# EAGLE board pic32 (EAGLE 5.12)
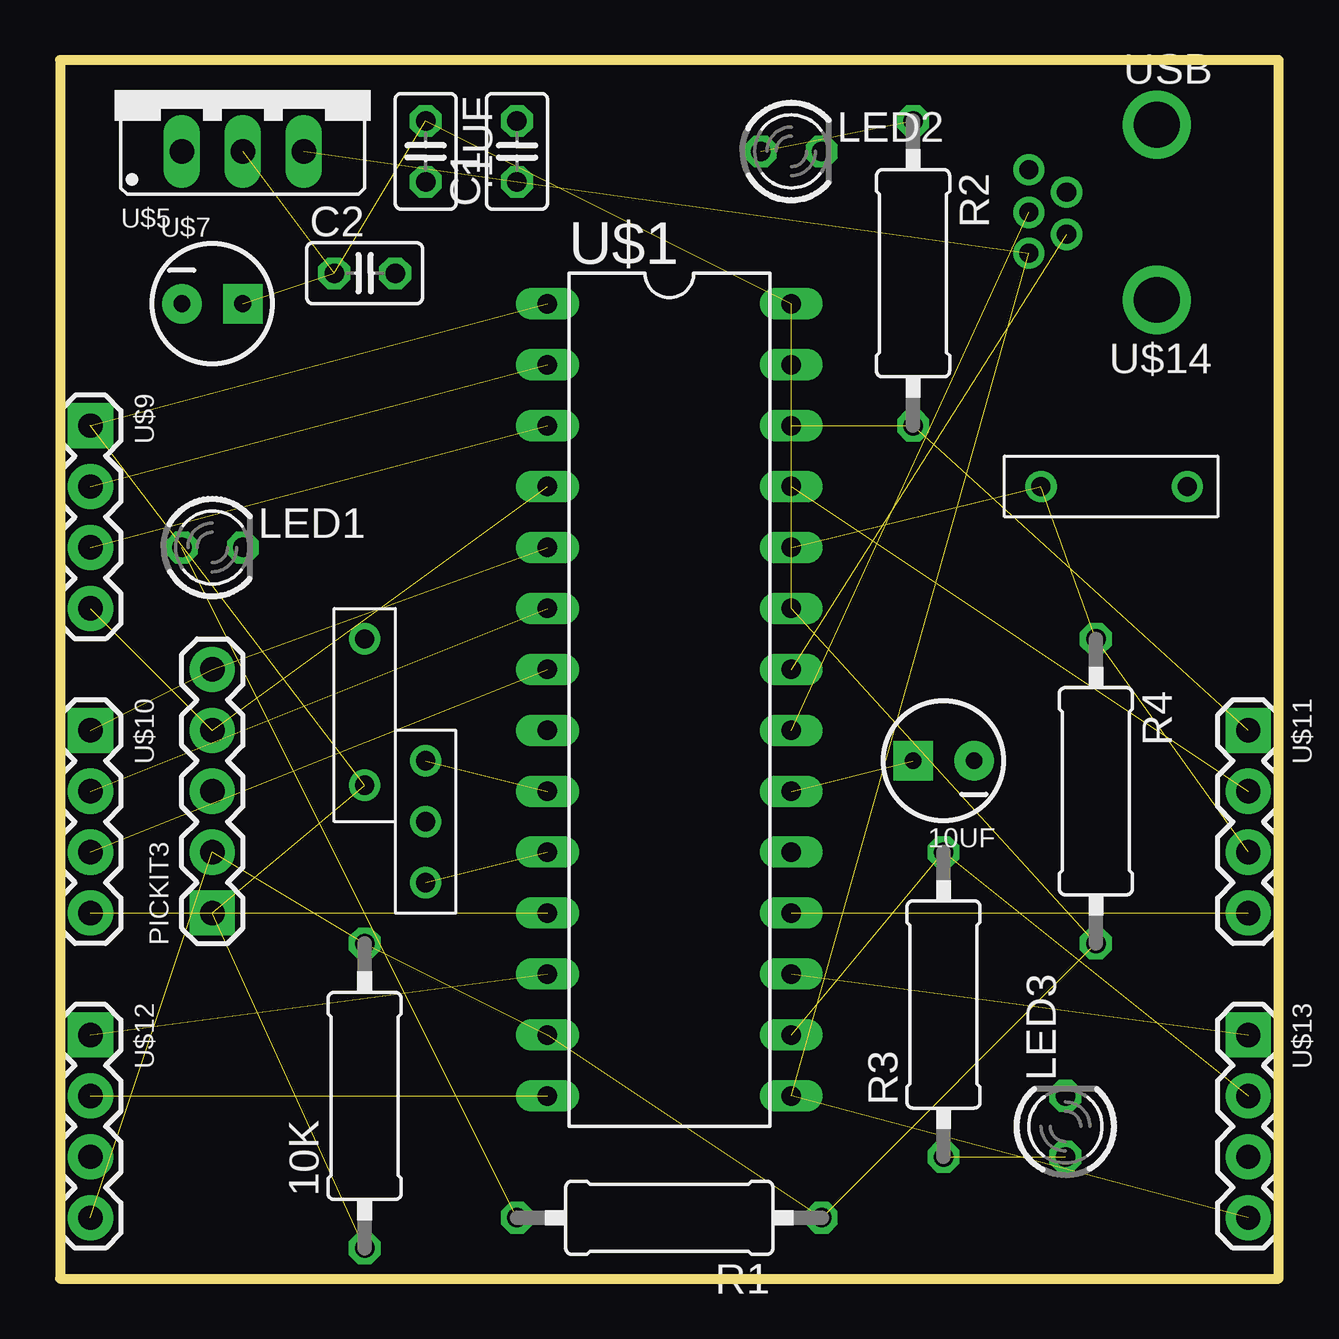
[diagram p0: board, top side]
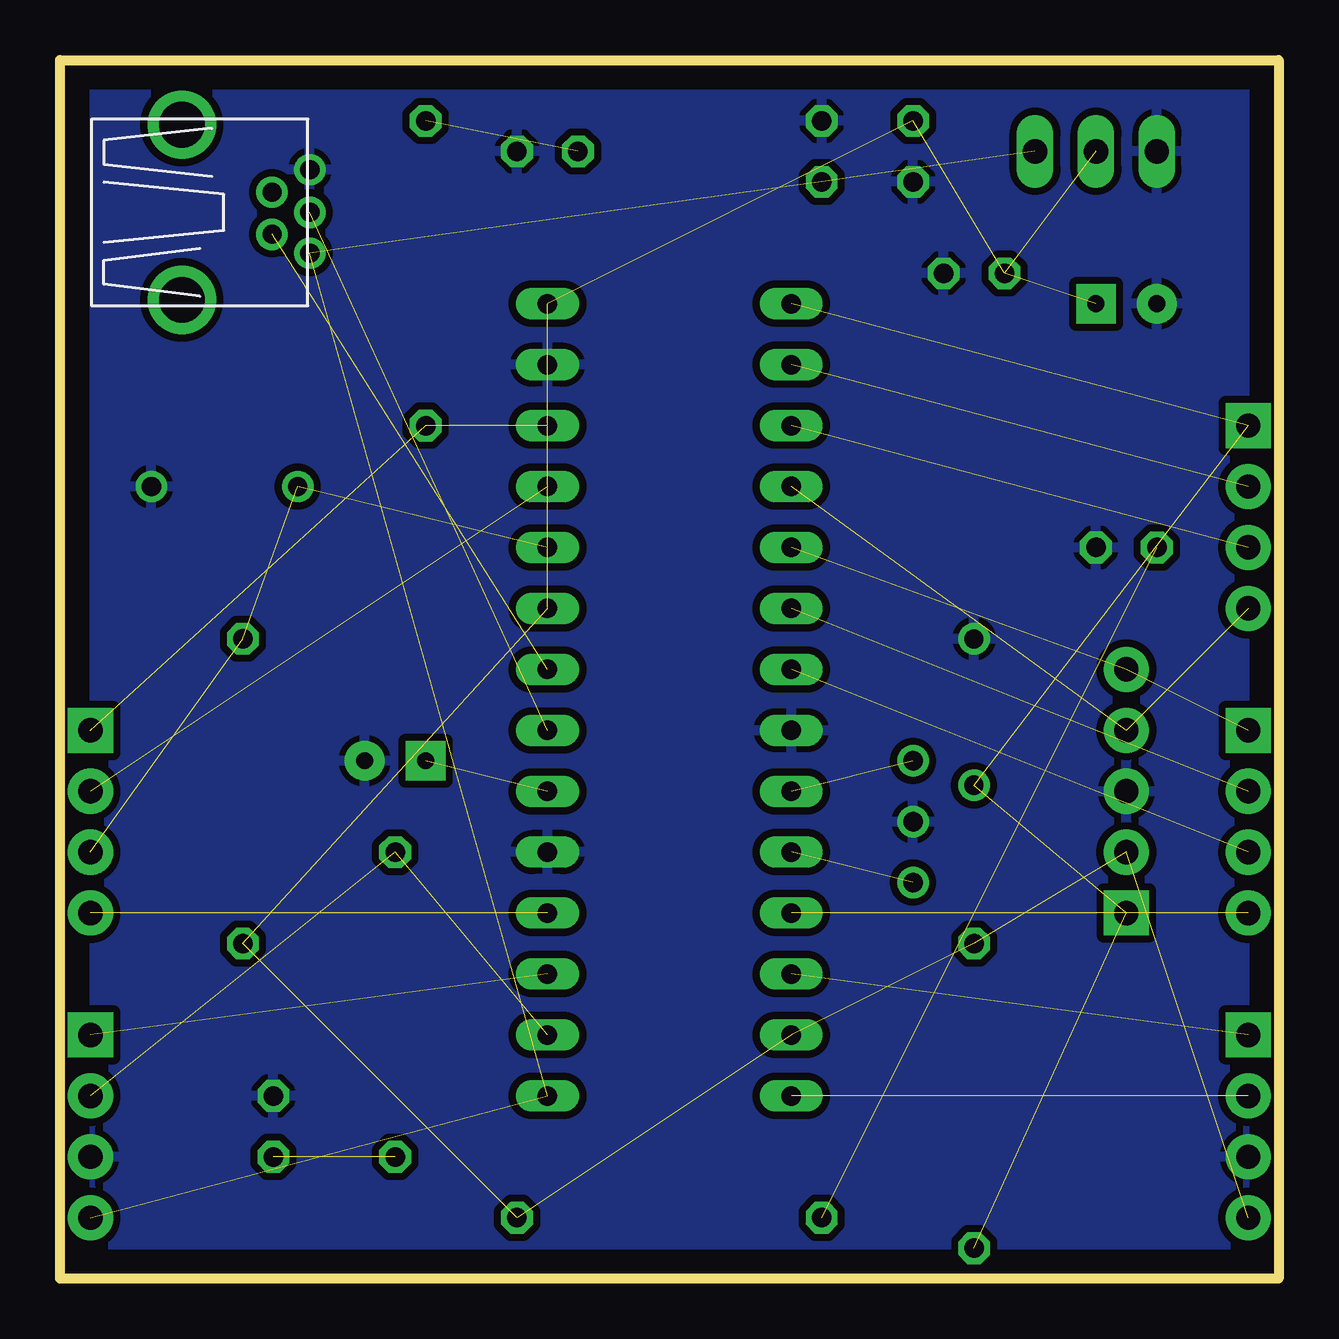
[diagram p1: board, bottom side, seen from below]

Size 50.8 x 50.8 mm. Coordinates in mm from the lower left corner, seen from the top.
Outline: 0,0 50.8,0 50.8,50.8 0,50.8 0,0
Copper layers (1*16): Top 0.035mm / dielectric 1.5mm / Bottom 0.035mm
Design rules "default": minimum track width 10mil, minimum drill 24mil, track to track 8mil, track to pad 8mil, pad to pad 8mil, via to via 8mil, smd to smd 8mil, copper to edge 40mil, drill to drill 8mil, minimum pad ring 10mil, minimum via ring 8mil, stop-mask expansion 4mil, vias tented up to drill 0mil, thermal gap 10mil

## Footprints (pad centres in the part's own frame; a part is rotated, then mirrored left to right if it is on the bottom)
0309/12 = drill 0.813 octagon: 1 -6.35,0; 2 6.35,0
CAP_POL_D = drill 0.7 pad 1.651 square: 1 1.27,0 | drill 0.7 pad 1.651 round: 2 -1.27,0
C025-025X050 = drill 0.813 octagon: 1 -1.27,0; 2 1.27,0
LED3MM = drill 0.813 octagon: A -1.27,0; K 1.27,0
1X05 = drill 1.016 pad 1.88 square: 1 0,0 | drill 1.016 pad 1.88 round: 2 2.54,0; 3 5.08,0; 4 7.62,0; 5 10.16,0
DIL28-4 = drill 0.813 long: 1 -16.51,-5.08; 2 -13.97,-5.08; 3 -11.43,-5.08; 4 -8.89,-5.08; 5 -6.35,-5.08; 6 -3.81,-5.08; 7 -1.27,-5.08; 8 1.27,-5.08; 9 3.81,-5.08; 10 6.35,-5.08; 11 8.89,-5.08; 12 11.43,-5.08; 13 13.97,-5.08; 14 16.51,-5.08; 15 16.51,5.08; 16 13.97,5.08; 17 11.43,5.08; 18 8.89,5.08; 19 6.35,5.08; 20 3.81,5.08; 21 1.27,5.08; 22 -1.27,5.08; 23 -3.81,5.08; 24 -6.35,5.08; 25 -8.89,5.08; 26 -11.43,5.08; 27 -13.97,5.08; 28 -16.51,5.08
2_LEAD_PUSH = drill 0.8 round: A -6.1,0; B 0,0
8MHZ_RES = drill 0.8 round: 1.OSC1 -2.54,0; 2.GND 0,0; 3.OSC2 2.54,0
TO220 = drill 1.016 long: 1 -2.54,0; 2 0,0; 3 2.54,0
1X04 = drill 1.016 pad 1.88 square: 1 0,0 | drill 1.016 pad 1.88 round: 2 2.54,0; 3 5.08,0; 4 7.62,0
USB-MINIB = drill 0.8 round: D+ 4.064,0; D- 2.489,0.914; GND 4.064,-1.778; ID 2.489,-0.838; VBUS 4.064,1.702 | drill 1.9 round: P$6 -1.27,-3.65; P$7 -1.27,3.65

## Placement (x,y rotation side)
10K  [0309/12]  12.7,7.62 90 top
10UF  CAP_POL  [CAP_POL_D]  36.83,21.59 180 top
.1UF  .1uF  [C025-025X050]  15.24,46.99 270 top
C1  .1uF  [C025-025X050]  19.05,46.99 90 top
C2  .1uF  [C025-025X050]  12.7,41.91 0 top
LED1  [LED3MM]  6.35,30.48 0 top
LED2  [LED3MM]  30.48,46.99 0 top
LED3  [LED3MM]  41.91,6.35 90 top
PICKIT3  1X05_HEADER  [1X05]  6.35,15.24 90 top
R1  330  [0309/12]  25.4,2.54 180 top
R2  330  [0309/12]  35.56,41.91 270 top
R3  330  [0309/12]  36.83,11.43 90 top
R4  10K  [0309/12]  43.18,20.32 270 top
U$1  PIC32  [DIL28-4]  25.4,24.13 270 top
U$2  2_LEAD_PUSH  [2_LEAD_PUSH]  12.7,26.67 90 top
U$3  8MHZ_RES  [8MHZ_RES]  15.24,19.05 270 top
U$5  LD1117  [TO220]  7.62,46.99 0 top
U$7  CAP_POL  [CAP_POL_D]  6.35,40.64 0 top
U$8  2_LEAD_PUSH  [2_LEAD_PUSH]  46.99,33.02 0 top
U$9  1X04_HEADER  [1X04]  1.27,35.56 270 top
U$10  1X04_HEADER  [1X04]  1.27,22.86 270 top
U$11  1X04_HEADER  [1X04]  49.53,22.86 270 top
U$12  1X04_HEADER  [1X04]  1.27,10.16 270 top
U$13  1X04_HEADER  [1X04]  49.53,10.16 270 top
U$14  USB  [USB-MINIB]  44.45,44.45 180 top

## Library data of the parts
10K 10UF .1UF C1 C2 LED1-LED3 PICKIT3 R1-R4 U$1-U$3 U$5 U$7-U$14 = ME433

## Nets
3.3V: 10K.2 .1UF.1 C2.1 PICKIT3.2 R1.1 R4.2 U$1.13 U$1.23 U$1.28 U$5.2 U$7.1 U$12.4
5V: C1.1 U$1.15 U$5.3 U$13.4 U$14.VBUS
A0: U$1.2 U$9.2
A1: U$1.3 U$9.3
A4: U$1.12 U$12.1
B0: PICKIT3.4 U$1.4 U$9.4
B1: PICKIT3.5 U$1.5 U$10.1
B2: U$1.6 U$10.2
B3: U$1.7 U$10.3
B4: U$1.11 U$10.4
B5: U$1.14 U$12.2
B7: R3.2 U$1.16 U$13.2
B8: U$1.17 U$13.1
B9: U$1.18 U$11.4
B13: R4.1 U$1.24 U$8.A U$11.3
B14: U$1.25 U$11.2
B15: R2.2 U$1.26 U$11.1
D+: U$1.21 U$14.D+
D-: U$1.22 U$14.D-
GND: 10UF.2 .1UF.2 C1.2 C2.2 LED1.K LED2.K LED3.K PICKIT3.3 U$1.8 U$1.19 U$1.27 U$2.B U$3.2.GND U$5.1 U$7.2 U$8.B U$12.3 U$13.3 U$14.GND
MCLR: 10K.1 PICKIT3.1 U$1.1 U$2.A U$9.1
N$1: LED3.A R3.1
N$2: U$1.9 U$3.1.OSC1
N$3: U$1.10 U$3.3.OSC2
N$5: LED1.A R1.2
N$6: 10UF.1 U$1.20
N$12: LED2.A R2.1

## Tracks (layer width: path | path; a pad name or v marks a point on that pad's centre or on a via)
3.3V  (11 unrouted)
5V  (4 unrouted)
A0  (1 unrouted)
A1  (1 unrouted)
A4  (1 unrouted)
B0  (2 unrouted)
B1  (2 unrouted)
B2  (1 unrouted)
B3  (1 unrouted)
B4  (1 unrouted)
B5  (1 unrouted)
B7  (2 unrouted)
B8  (1 unrouted)
B9  (1 unrouted)
B13  (3 unrouted)
B14  (1 unrouted)
B15  (2 unrouted)
D+  (1 unrouted)
D-  (1 unrouted)
GND
  pour Bottom (isolate 0.305): -1.27,52.07 -1.27,-1.27 52.07,-1.27 52.07,-2.54 53.34,-2.54 53.34,52.07
MCLR  (4 unrouted)
N$1  (1 unrouted)
N$2  (1 unrouted)
N$3  (1 unrouted)
N$5  (1 unrouted)
N$6  (1 unrouted)
N$12  (1 unrouted)